# Altium PCB BMS.PcbDoc (part 1 of 2)
Units mil, origin at the board's own origin, x right, y up, seen from the top; angles counter-clockwise.
Board outline 4330.71 x 4330.71 mil, 2 copper layers (Top Layer, Bottom Layer); 161 components, 100 nets, 497 pads, 6 vias.
Unrouted connection lines stored in the file: 354.
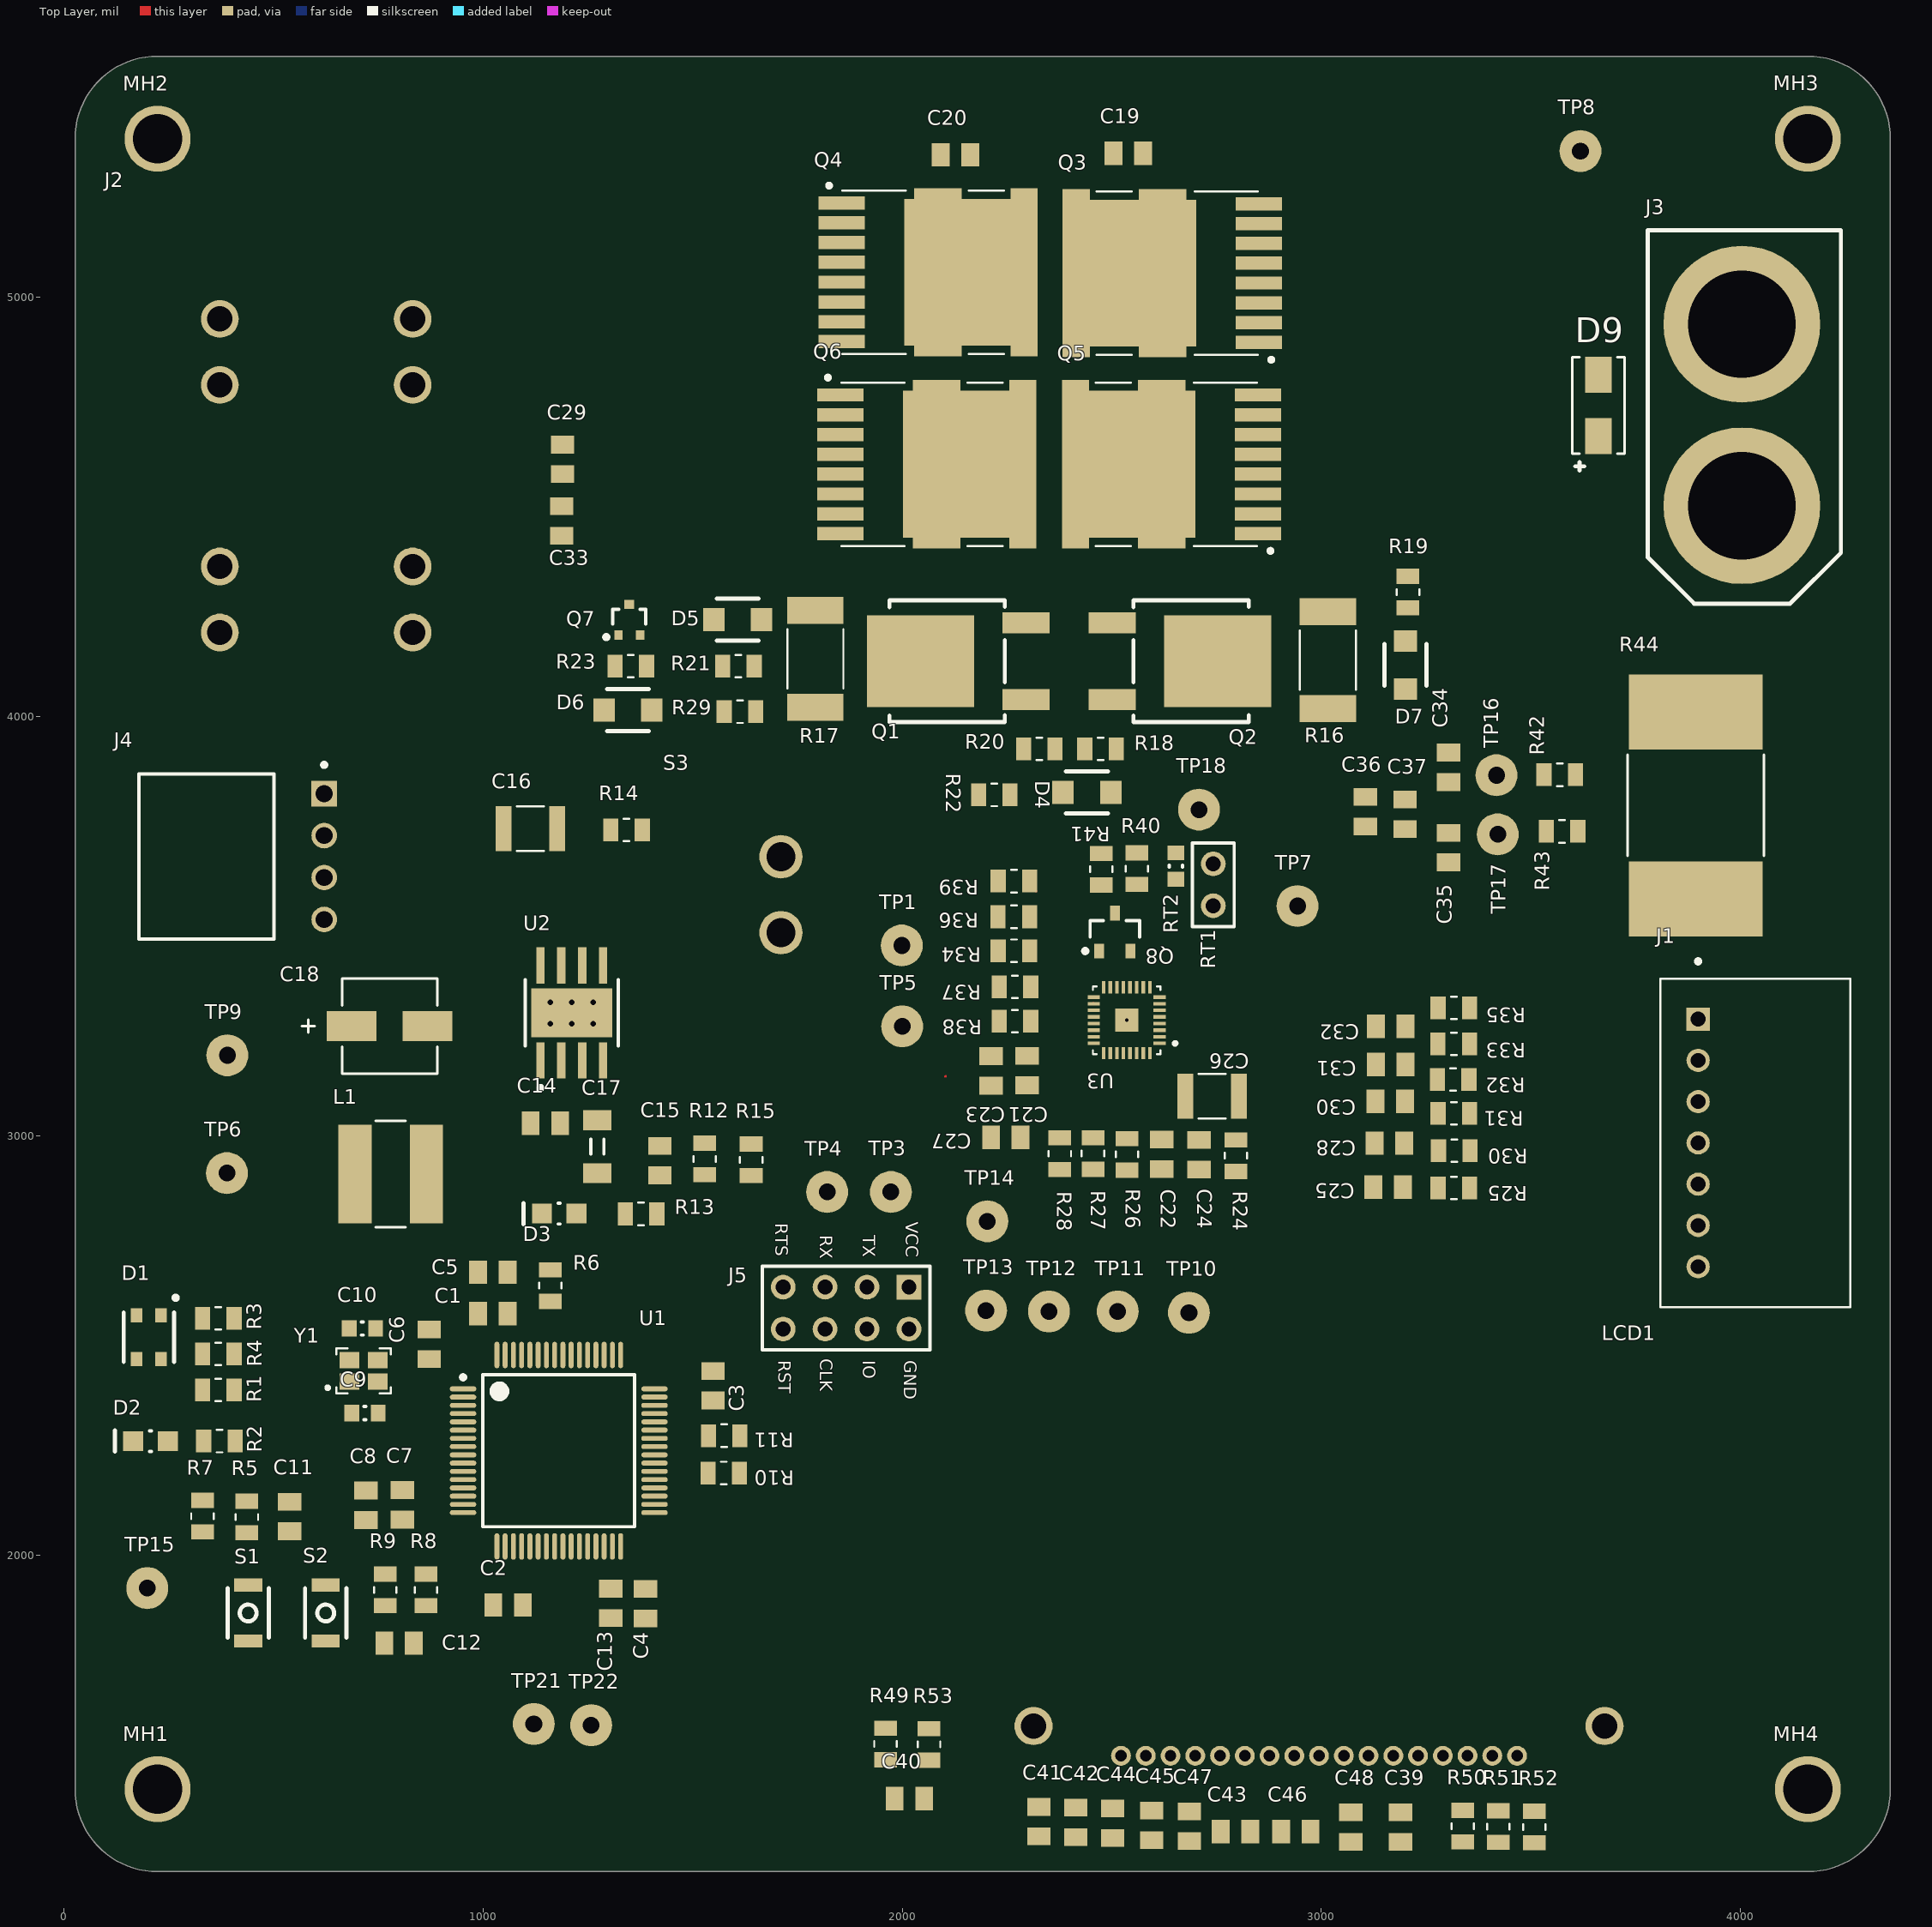
[diagram p0: Top Layer view]
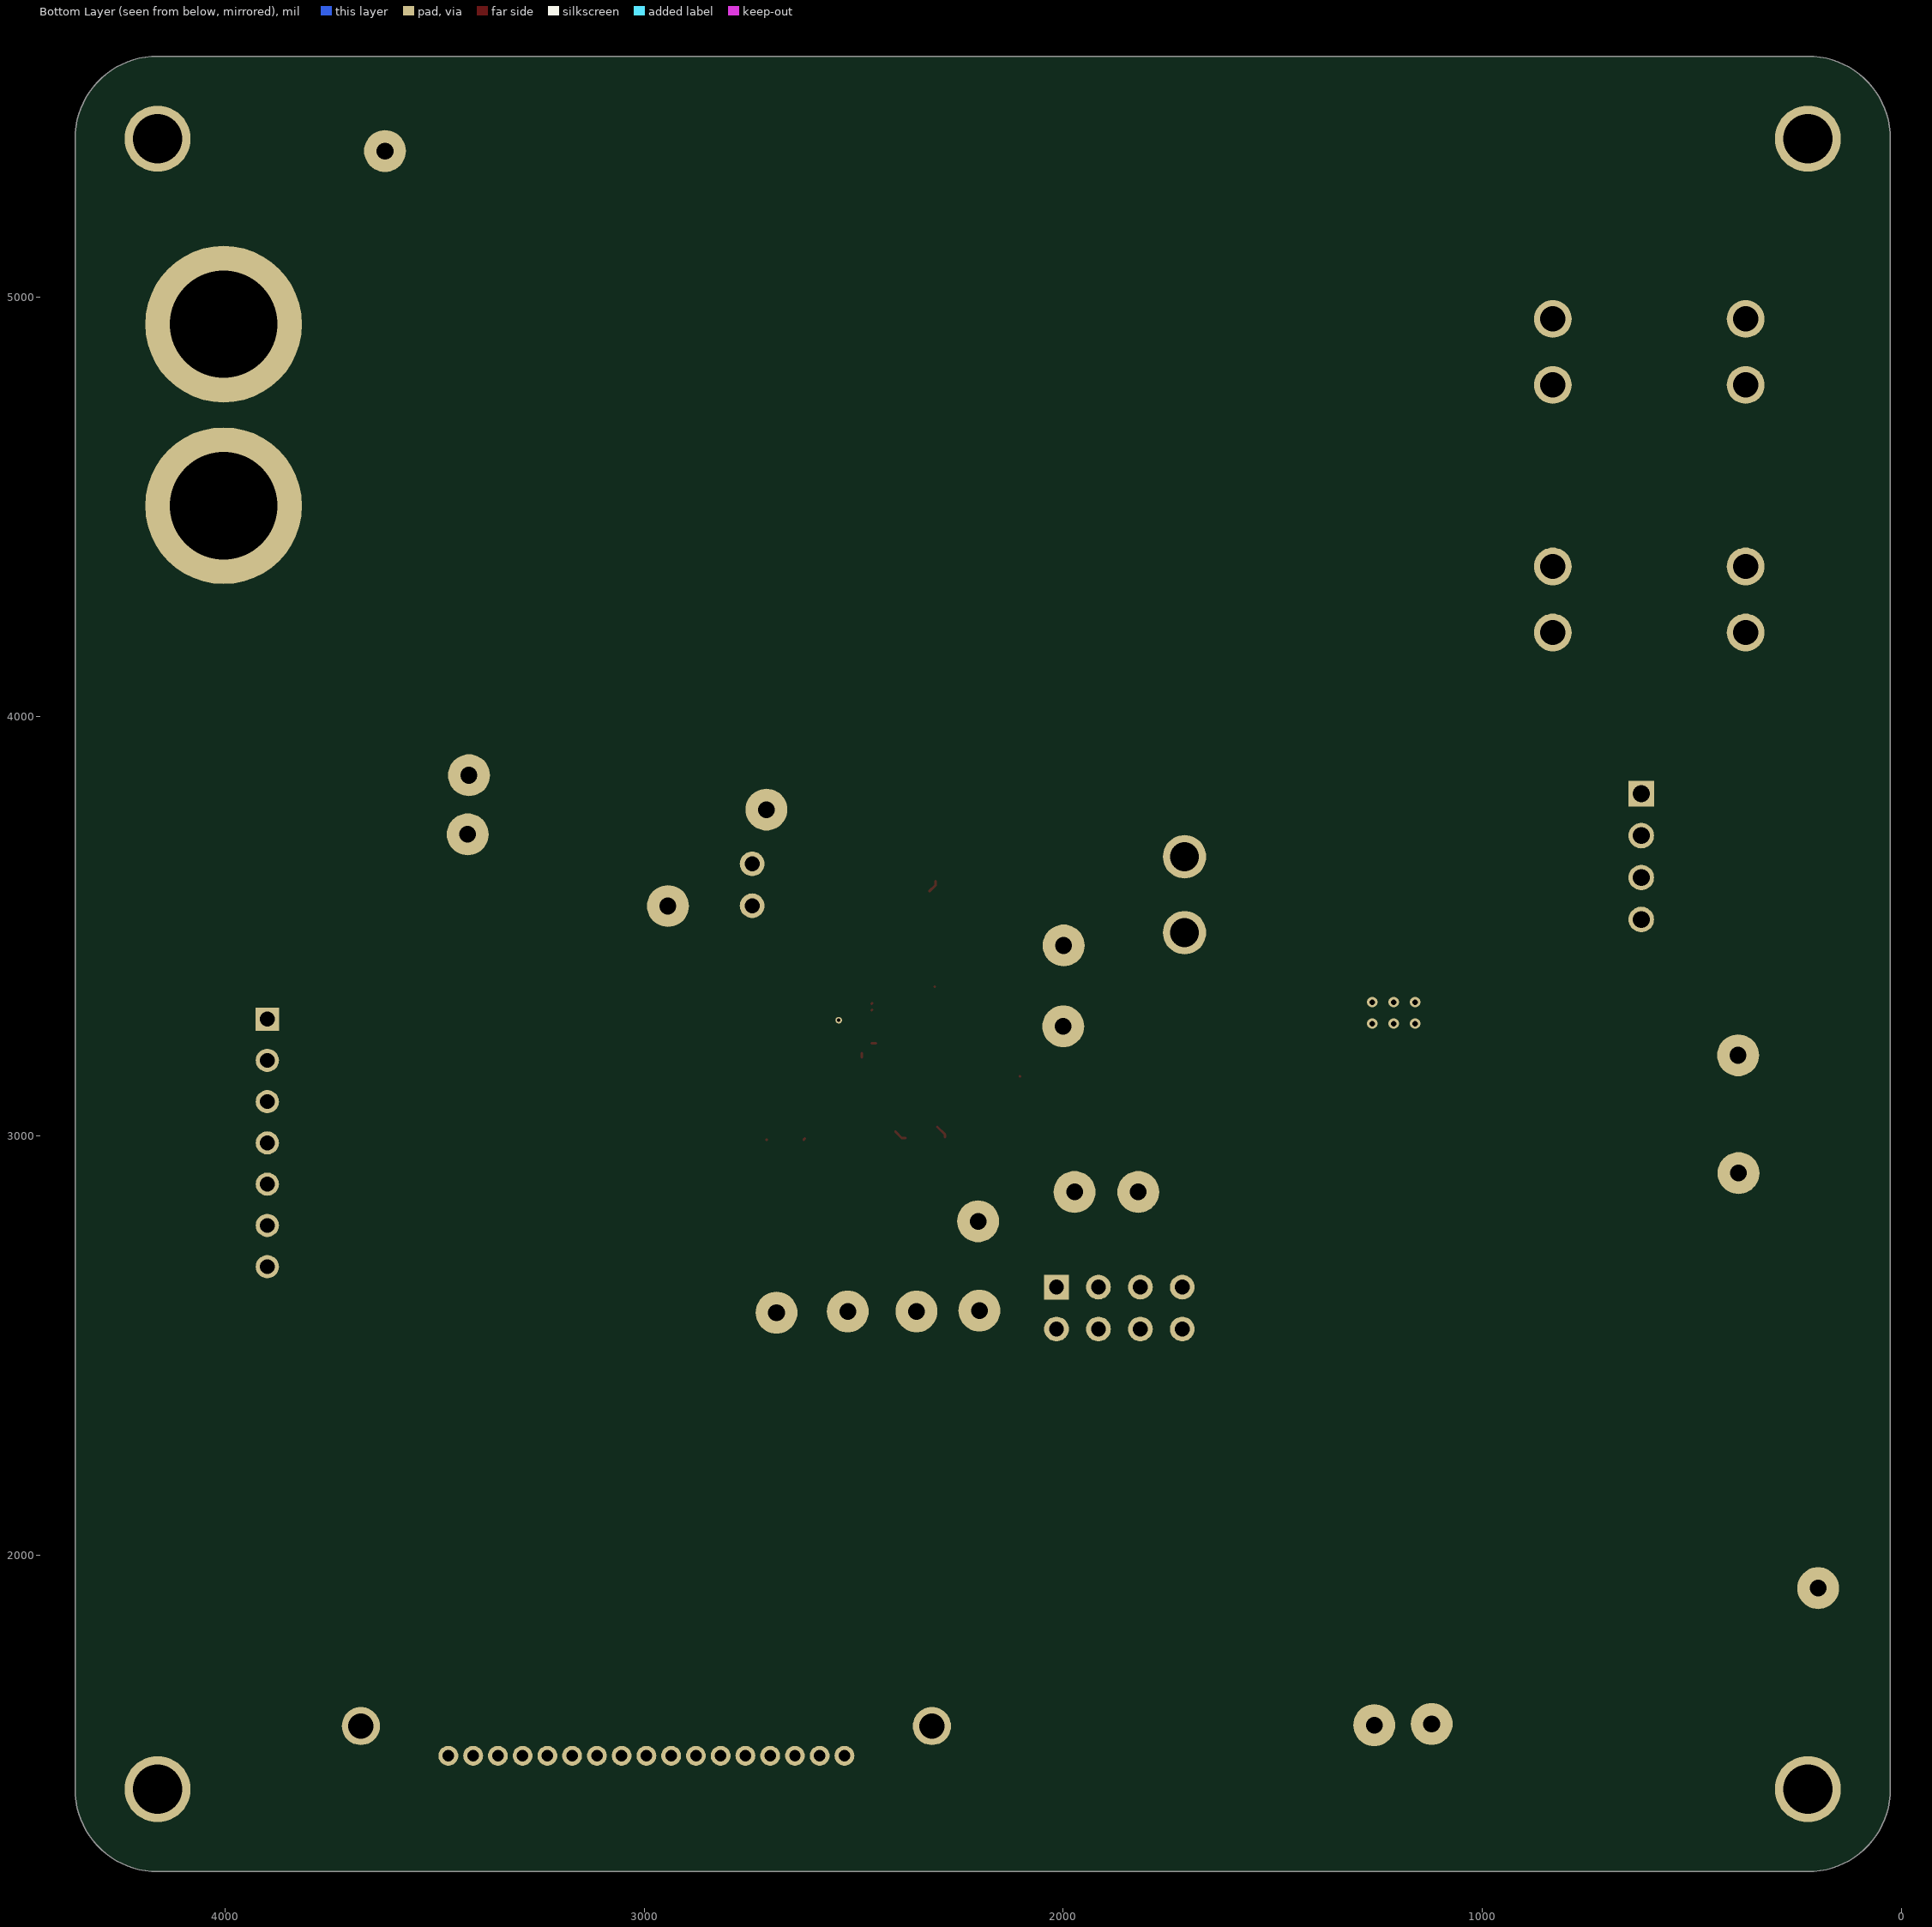
[diagram p1: Bottom Layer view, seen from below]

## Layer stack, top to bottom
Top Solder: solder mask 0.4, Solder Resist, Dk 3.5
Top Layer: signal copper 1.4
Dielectric 1: dielectric 12.6, FR-4, Dk 4.8
Bottom Layer: signal copper 1.4
Bottom Solder: solder mask 0.4, Solder Resist, Dk 3.5

## Board outline
223.54,1244.57 cw(c223.54,1441.42) 26.69,1441.42 26.69,5378.43 cw(c223.54,5378.43) 223.54,5575.28 4160.54,5575.28 cw(c4160.54,5378.43) 4357.4,5378.43 4357.4,1441.42 cw(c4160.54,1441.42) 4160.54,1244.57

## Design rules (kind name [scope] priority, off if disabled: settings)
Clearance [All] p1: gap=6 ignorepadtopadclearanceinfootprint=FALSE
Height [All] p1 off: minheight=0 maxheight=1000 prefheight=500
PolygonConnect [All] p1: connectstyle=Relief reliefconductorwidth=10 reliefentries=4 polygonreliefangle="90 Angle" airgapwidth=10
RoutingVias [All] p1: holewidth=28 width=50 viastyle="Through Hole" minholewidth=28 minwidth=50 maxholewidth=28 maxwidth=50
SolderMaskExpansion [All] p1: expansion=4 istentingtop=FALSE
Width [All] p1: maxlimit=6 minlimit=6 preferedwidth=6 minimp=50.000000 maximp=50.000000 favimp=50.000000
29 further rules are at their usual default settings.

## Classes and differential pairs
component class "SD Card": C38 D8 J6 R45 R46 R47 R48 TP19 TP20
component class Power: C14 C15 C16 C17 C18 D3 L1 R12 R13 R14 R15 S3 TP8 TP9 U2
component class MCU: C1 C2 C3 C4 C5 C6 C7 C8 C9 C10 C11 C12 C13 D1 D2 MH1 MH2 MH3 MH4 R1 R2 R3 R4 R5 R6 R7 R8 R9 R10 R11 S1 S2 TP1 TP2 TP3 TP4 TP5 TP6 TP7 U1 Y1
component class LCD: C39 C40 C41 C42 C43 C44 C45 C46 C47 C48 LCD1 R49 R50 R51 R52 R53 TP21 TP22
component class Connectors: D9 J1 J2 J3 J4 J5
component class "Battery Manager": C19 C20 C21 C22 C23 C24 C25 C26 C27 C28 C29 C30 C31 C32 C33 C34 C35 C36 C37 D4 D5 D6 D7 Q1 Q2 Q3 Q4 Q5 Q6 Q7 Q8 R16 R17 R18 R19 R20 R21 R22 R23 R24 R25 R26 R27 R28 R29 R30 R31 R32 R33 R34 R35 R36 R37 R38 R39 R40 R41 R42 R43 R44 RT1 RT2 TP10 TP11 TP12 TP13 TP14 TP15 TP16 TP17 TP18 U3

## Components (designator, comment, footprint, x,y, rotation, side; value= is the part's Value field where it differs from the comment)
C1 "CAP_0.1uF_50V_0805" CAPC2012X140N 1023.65,2575.65 r180 top value=0.1uF
C2 "CAP_0.1uF_50V_0805" CAPC2012X140N 1059.88,1880.65 r0 top value=0.1uF
C3 "CAP_0.1uF_50V_0805" CAPC2012X140N 1548.65,2403.65 r90 top value=0.1uF
C4 "CAP_0.1uF_50V_0805" CAPC2012X140N 1387.65,1883.65 r90 top value=0.1uF
C5 "CAP_4.7uF_16V_0805" CAPC2012X140N 1023.65,2674.65 r180 top value=4.7uF
C6 "CAP_0.1uF_50V_0805" CAPC2012X140N 871.65,2502.65 r270 top value=0.1uF
C7 "CAP_0.1uF_50V_0805" CAPC2012X140N 807.65,2119.65 r270 top value=0.1uF
C8 "CAP_1uF_16V_0805" CAPC2012X140N 720.65,2118.65 r270 top value=1uF
C9 "CL10C140JB8NNNC" CAPC0603(1608)55_N 718.14,2338.65 r180 top value=14pF
C10 "CL10C140JB8NNNC" CAPC0603(1608)55_N 712.11,2540.24 r180 top value=14pF
C11 "CAP_1uF_16V_0805" CAPC2012X140N 538.65,2091.65 r90 top value=1uF
C12 "CAP_1uF_16V_0805" CAPC2012X140N 799.65,1789.65 r0 top value=1uF
C13 "CAP_4.7uF_16V_0805" CAPC2012X140N 1304.65,1884.65 r90 top value=4.7uF
C14 "CAP_0.1uF_50V_0805" CAPC2012X140N 1148.65,3030.06 r0 top value=0.1uF
C15 "CAP_150pF_250V_0805" CAPC2012X140N 1421.65,2940.65 r90 top value=150pF
C16 "CAP_10uF_100V_1210" CAPC1210(3225) 1113.33,3732.65 r0 top value=10uF
C17 "CAP_2.2uF_50V_1206" CAPC1206(3216) 1272.65,2974.06 r90 top value=2.2uF
C18 "CAP_220uF_6.3V_SMD" PCAP_SVP_B6_PA00 777.15,3261.65 r0 top value=220uF
C19 "CAP_0.1uF_50V_0805" CAPC2012X140N 2539.22,5343.92 r180 top value=0.1uF
C20 "CAP_0.1uF_50V_0805" CAPC2012X140N 2126.98,5339.92 r180 top value=0.1uF
C21 "CAP_100pF_50V_0805" CAPC2012X140N 2297.71,3155.4 r90 top value=100pF
C22 "CAP_100pF_50V_0805" CAPC2012X140N 2619.04,2955.7 r270 top value=100pF
C23 "CAP_100pF_50V_0805" CAPC2012X140N 2211.71,3154.63 r90 top value=100pF
C24 "CAP_100pF_50V_0805" CAPC2012X140N 2708.04,2954.7 r270 top value=100pF
C25 "CAP_0.1uF_50V_0805" CAPC2012X140N 3159.1,2877.2 r180 top value=0.1uF
C26 "CAP_2.2uF_100V_1210" CAPC1210(3225) 2739.04,3094.44 r180 top value=2.2uF
C27 "CAP_0.01uF_100V_0805" CAPC2012X140N 2247.04,2996.44 r0 top value=0.01uF
C28 "CAP_0.1uF_50V_0805" CAPC2012X140N 3162.1,2982.2 r0 top value=0.1uF
C29 "CAP_0.1uF_50V_0805" CAPC2012X140N 1189.65,4613.65 r90 top value=0.1uF
C30 "CAP_0.1uF_50V_0805" CAPC2012X140N 3164.1,3082.2 r180 top value=0.1uF
C31 "CAP_0.1uF_50V_0805" CAPC2012X140N 3165.1,3170.2 r0 top value=0.1uF
C32 "CAP_0.1uF_50V_0805" CAPC2012X140N 3165.1,3261.2 r180 top value=0.1uF
C33 "CAP_0.1uF_50V_0805" CAPC2012X140N 1187.65,4466.65 r90 top value=0.1uF
C34 "CAP_0.1uF_50V_0805" CAPC2012X140N 3303.65,3879.07 r90 top value=0.1uF
C35 "CAP_0.1uF_50V_0805" CAPC2012X140N 3303.65,3687.31 r90 top value=0.1uF
C36 "CAP_100pF_50V_0805" CAPC2012X140N 3104.65,3773.07 r270 top value=100pF
C37 "CAP_0.1uF_50V_0805" CAPC2012X140N 3199.65,3767.07 r270 top value=0.1uF
C38 "CAP_0.1uF_50V_0805" CAPC2012X140N 9459,11028.76 r90 top value=0.1uF
C39 "CAP_0.1uF_50V_0805" CAPC2012X140N 3189,1351 r270 top value=0.1uF
C40 "CAP_0.1uF_50V_0805" CAPC2012X140N 2017,1419 r0 top value=0.1uF
C41 "CAP_0.1uF_50V_0805" CAPC2012X140N 2326,1364 r90 top value=0.1uF
C42 "CAP_0.1uF_50V_0805" CAPC2012X140N 2414,1362 r90 top value=0.1uF
C43 "CAP_2.2uF_25V_0805" CAPC2012X140N 2795,1340 r180 top value=2.2uF
C44 "CAP_0.1uF_50V_0805" CAPC2012X140N 2502,1360 r90 top value=0.1uF
C45 "CAP_0.1uF_50V_0805" CAPC2012X140N 2595,1355 r90 top value=0.1uF
C46 "CAP_2.2uF_25V_0805" CAPC2012X140N 2939,1340 r180 top value=2.2uF
C47 "CAP_0.1uF_50V_0805" CAPC2012X140N 2685,1353 r90 top value=0.1uF
C48 "CAP_2.2uF_25V_0805" CAPC2012X140N 3070,1351 r90 top value=2.2uF
D1 "LED_RGB" LED_RGB 202.68,2519.48 r180 top
D2 "DIO_LED_G" LED_0805_LINE 206.65,2271.65 r180 top
D3 "DIO_LED_G" LED_0805_LINE 1181.61,2814.22 r180 top
D4 "B0540W-7-F" SOD-123_FLAT 2440.65,3819.07 r0 top value=170pF
D5 "DIO_ZENER_16V" SOD-123_FLAT 1607.65,4231.5 r180 top
D6 "1N4148W-7-F" SOD-123_FLAT 1345.65,4015.5 r180 top value=100V
D7 "B0540W-7-F" SOD-123_FLAT 3200.65,4123.16 r90 top value=170pF
D8 "DIO_LED_G" LED_0805_LINE 8612,10587 r270 top
D9 "P4SMA30A-E3/61" DO-214AC_UNI 3661,4741.88 r90 top
J1 "CON_7M_TH_RA" JST_S7B-XH-A(LF)(SN) 4035,2983 r270 top
J2 "SCREW_TERM_115A" MOLEX-0399200302 635.15,4751.7 r270 top
J3 "XT90" XT90 1680.17,1983.24 r0 top
J4 "CON_4M_TH_RA" MOLEX-22-05-3041_V 621,3666 r270 top
J5 "HEADER 4X2" HEADER_2X4 2016,2639 r180 top
J6 "SD_CARD_CON" HRS_DM1AA-SF-PEJ(21) 9378,10233 r0 top
L1 "SRN6045-150M" IND_BOURNS_SRN6045 779.65,2908.65 r0 top
LCD1 "NHD-C12832A1Z-FSW-FBW-3V3" NHDC12832A1ZFSWFBW3V3 2521.94,1521 r0 top
MH1 "MOUNTING_HOLES" MOUNTING_HOLE 223.54,1441.42 r0 top
MH2 "MOUNTING_HOLES" MOUNTING_HOLE 223.54,5378.43 r0 top
MH3 "MOUNTING_HOLES" MOUNTING_HOLE 4160.54,5378.43 r0 top
MH4 "MOUNTING_HOLES" MOUNTING_HOLE 4160.54,1441.42 r0 top
Q1 "PMOS_40V_40A" D-PAK 2169.65,4132.07 r90 top
Q2 "PMOS_40V_40A" D-PAK 2626.66,4132.07 r270 top
Q3 "NMOS_100V_210A" 8-HPSOF 2644.22,5057.92 r90 top
Q4 "NMOS_100V_210A" 8-HPSOF 2061.83,5059.92 r270 top
Q5 "NMOS_100V_210A" 8-HPSOF 2642.22,4601.92 r90 top
Q6 "NMOS_100V_210A" 8-HPSOF 2058.83,4601.92 r270 top
Q7 "NMOS_60V_310mA" SOT323 1349.06,4230.91 r270 top
Q8 "NMOS_50V_200mA" SOT23-3 2507.44,3485.98 r90 top
R1 "RES_20Ω_0805" RESC2012X60N 368.65,2393.65 r0 top value=20Ω
R2 "RES_100Ω_0805" RESC2012X60N 371.05,2271.65 r0 top value=100Ω
R3 "RES_100Ω_0805" RESC2012X60N 368.65,2564.65 r180 top value=100Ω
R4 "RES_20Ω_0805" RESC2012X60N 368.65,2479.65 r0 top value=20Ω
R5 "RES_1kΩ_0805" RESC2012X60N 436.65,2090.65 r270 top value=1kΩ
R6 "RES_10kΩ_0805" RESC2012X60N 1160.65,2642.65 r90 top value=10kΩ
R7 "RES_10kΩ_0805" RESC2012X60N 330.65,2092.65 r90 top value=10kΩ
R8 "RES_1kΩ_0805" RESC2012X60N 863.65,1916.65 r90 top value=1kΩ
R9 "RES_10kΩ_0805" RESC2012X60N 766.65,1916.65 r90 top value=10kΩ
R10 "RES_1kΩ_0805" RESC2012X60N 1574.24,2195.65 r0 top value=1kΩ
R11 "RES_1kΩ_0805" RESC2012X60N 1575.24,2284.65 r0 top value=1kΩ
R12 "RES_51kΩ_0805" RESC2012X60N 1528.65,2944.65 r270 top value=51kΩ
R13 "RES_100Ω_0805" RESC2012X60N 1377.24,2813.65 r0 top value=100Ω
R14 "RES_1kΩ_0805" RESC2012X60N 1342.24,3729.65 r180 top value=1kΩ
R15 "RES_22.1kΩ_0805" RESC2012X60N 1639.65,2942.65 r90 top
R16 "RES_200Ω_2512" RESC6532X75N 3015.65,4134.65 r270 top value=200Ω
R17 "RES_200Ω_2512" RESC6532X75N 1792.65,4137.5 r90 top value=200Ω
R18 "RES_10MΩ_0805" RESC2012X60N 2473.24,3923.07 r180 top value=10MΩ
R19 "RES_10MΩ_0805" RESC2012X60N 3206.65,4297.07 r270 top value=10MΩ
R20 "RES_10MΩ_0805" RESC2012X60N 2327.05,3923.07 r0 top value=10MΩ
R21 "RES_10MΩ_0805" RESC2012X60N 1609.24,4120.5 r0 top value=10MΩ
R22 "RES_510Ω_0805" RESC2012X60N 2219.65,3813.07 r0 top value=510Ω
R23 "RES_10kΩ_0805" RESC2012X60N 1352.65,4120.5 r180 top value=10kΩ
R24 "RES_100Ω_0805" RESC2012X60N 2796.04,2952.44 r90 top value=100Ω
R25 "RES_100Ω_0805" RESC2012X60N 3316.1,2875.2 r180 top value=100Ω
R26 "RES_1kΩ_0805" RESC2012X60N 2536.04,2955.7 r270 top value=1kΩ
R27 "RES_10kΩ_0805" RESC2012X60N 2455.04,2957.7 r270 top value=10kΩ
R28 "RES_1kΩ_0805" RESC2012X60N 2376.04,2957.3 r270 top value=1kΩ
R29 "RES_1.1kΩ_0805" RESC2012X60N 1613.05,4011.5 r0 top value=1.1kΩ
R30 "RES_100Ω_0805" RESC2012X60N 3317.1,2964.2 r180 top value=100Ω
R31 "RES_100Ω_0805" RESC2012X60N 3316.1,3053.2 r180 top value=100Ω
R32 "RES_100Ω_0805" RESC2012X60N 3314.5,3134.2 r180 top value=100Ω
R33 "RES_100Ω_0805" RESC2012X60N 3315.7,3219.2 r180 top value=100Ω
R34 "RES_10kΩ_0805" RESC2012X60N 2266.63,3441.44 r180 top value=10kΩ
R35 "RES_100Ω_0805" RESC2012X60N 3316.1,3305.2 r180 top value=100Ω
R36 "RES_100Ω_0805" RESC2012X60N 2266.23,3522.44 r0 top value=100Ω
R37 "RES_10kΩ_0805" RESC2012X60N 2269.04,3355.44 r180 top value=10kΩ
R38 "RES_10kΩ_0805" RESC2012X60N 2269.04,3273.44 r180 top value=10kΩ
R39 "RES_100Ω_0805" RESC2012X60N 2266.63,3607.44 r0 top value=100Ω
R40 "RES_10MΩ_0805" RESC2012X60N 2560.04,3637.04 r90 top value=10MΩ
R41 "RES_10MΩ_0805" RESC2012X60N 2475.04,3635.7 r270 top value=10MΩ
R42 "RES_100Ω_0805" RESC2012X60N 3568.65,3861.07 r180 top value=100Ω
R43 "RES_100Ω_0805" RESC2012X60N 3574.24,3726.07 r180 top value=100Ω
R44 "RES_1mΩ_5931" RES-5931 3893,3788 r270 top value=1mΩ
R45 "RES_1kΩ_0805" RESC2012X60N 8651,10019 r180 top value=1kΩ
R46 "RES_1kΩ_0805" RESC2012X60N 8642,10368 r180 top value=1kΩ
R47 "RES_100Ω_0805" RESC2012X60N 8612,10801 r90 top value=100Ω
R48 "RES_1kΩ_0805" RESC2012X60N 9649,11038 r90 top value=1kΩ
R49 "RES_100Ω_0805" RESC2012X60N 1960,1549 r270 top value=100Ω
R50 "RES_1kΩ_0805" RESC2012X60N 3337,1353 r270 top value=1kΩ
R51 "RES_1kΩ_0805" RESC2012X60N 3422,1352 r270 top value=1kΩ
R52 "RES_1kΩ_0805" RESC2012X60N 3508,1351 r270 top value=1kΩ
R53 "RES_1kΩ_0805" RESC2012X60N 2064,1548 r90 top value=1kΩ
RT1 "THERM_10k_FREE_HANGING" "HDR1X2 - PTH Thermistor" 2742.04,3548.7 r90 top
RT2 "THERM_10k_0603" RESC0603(1608)_N 2653.04,3611.71 r90 top
S1 "SW_TACTILE" B3U-1000P 439.65,1861.65 r270 top
S2 "SW_TACTILE" B3U-1000P 624.65,1861.65 r270 top
S3 "GF-123-0054" GF1230054 1710.65,3484.55 r270 top
TP1 "TESTPOINT_LOOP" TESTPOINT_LOOP 1999,3454 r0 top
TP2 "TESTPOINT_LOOP" TESTPOINT_LOOP 9438,8356 r0 top
TP3 "TESTPOINT_LOOP" TESTPOINT_LOOP 1973,2866 r0 top
TP4 "TESTPOINT_LOOP" TESTPOINT_LOOP 1821,2866 r0 top
TP5 "TESTPOINT_LOOP" TESTPOINT_LOOP 2000,3261 r0 top
TP6 "TESTPOINT_LOOP" TESTPOINT_LOOP 389,2911 r0 top
TP7 "TESTPOINT_LOOP" TESTPOINT_LOOP 2943,3548 r0 top
TP8 "TESTPOINT_LOOP" TESTPOINT_LOOP 3618,5349 r0 top
TP9 "TESTPOINT_LOOP" TESTPOINT_LOOP 390,3192 r0 top
TP10 "TESTPOINT_LOOP" TESTPOINT_LOOP 2684,2578 r90 top
TP11 "TESTPOINT_LOOP" TESTPOINT_LOOP 2514,2581 r90 top
TP12 "TESTPOINT_LOOP" TESTPOINT_LOOP 2350,2581 r90 top
TP13 "TESTPOINT_LOOP" TESTPOINT_LOOP 2200,2583 r90 top
TP14 "TESTPOINT_LOOP" TESTPOINT_LOOP 2203,2796 r90 top
TP15 "TESTPOINT_LOOP" TESTPOINT_LOOP 199,1921 r90 top
TP16 "TESTPOINT_LOOP" TESTPOINT_LOOP 3417.65,3860.07 r180 top
TP17 "TESTPOINT_LOOP" TESTPOINT_LOOP 3420.65,3719.07 r180 top
TP18 "TESTPOINT_LOOP" TESTPOINT_LOOP 2708,3778 r90 top
TP19 "TESTPOINT_LOOP" TESTPOINT_LOOP 9556,11261 r90 top
TP20 "TESTPOINT_LOOP" TESTPOINT_LOOP 9068,11246 r90 top
TP21 "TESTPOINT_LOOP" TESTPOINT_LOOP 1121,1597 r90 top
TP22 "TESTPOINT_LOOP" TESTPOINT_LOOP 1258,1594 r90 top
U1 "STM32F446RET6" STM-LQFP64_L 1180.65,2248.65 r0 top
U2 "LMR23610ADDAR" "8-SO PowerPad" 1211.65,3293.06 r90 top
U3 "BQ40Z80RSMT" BQ40Z80RSMT 2535.58,3275.58 r180 top
Y1 "CRYSTAL_25MHZ" SOIC254P1016X440-4N 715.11,2439.24 r0 top

## Footprints (in the part's own frame and the unit in brackets; to place one, negate y for a bottom-side part, rotate by r counter-clockwise, add the part's x,y. Pads: shape width x height; smd on the part's side, far side on the other; paste and mask are expansions set on the pad)
8-HPSOF [mm]
  rect 0.8x2.8 smd: 1(-4.2,-5.24) 2(-3,-5.24) 2(-1.8,-5.24) 2(-0.6,-5.24) 2(0.6,-5.24) 2(1.8,-5.24) 2(3,-5.24) 2(4.2,-5.24)
  rect 10.2x1.65 smd: 3(0,5.815)
  rect 8.9x2.95 smd: 3(0,3.515)
  rect 8.9x0.6 smd: 3(0,-1.16)
  rect 10.2x2.9 smd: 3(0,0.59)
  silkscreen extent -5.37,-6.12 4.95,4.6, body extent -4.95,-5.83 4.95,5.84, height 1.8
"8-SO PowerPad" [mm]
  rect 2.2x0.5 smd paste-1000 mask+0: 1(-2.875,1.905) 2(-2.875,0.635) 3(-2.875,-0.635) 4(-2.875,-1.905) 5(2.875,-1.905) 6(2.875,-0.635) 7(2.875,0.635) 8(2.875,1.905)
  rect 2.95x4.9 smd paste-1000 mask-1000: 9(0,0)
  silkscreen extent -4.67,-2.83 2,2.83, body extent -4.08,-2.68 4.08,2.68, height 0.25
B3U-1000P [mm] "TACTILE SWITCH GREY"
  rect 0.8x1.7 smd: 1(-1.7,0) 2(1.7,0)
  silkscreen extent -1.5,-1.25 1.5,1.25, body extent -2,-1.25 2,1.25, height 1.6
BQ40Z80RSMT [mm] "QFN40P400X400X100-33N_BQ40Z80RSMT(Primary)"
  rect 0.74x0.22 smd: 1(-1.995,1.4) 2(-1.995,1) 3(-1.995,0.6) 4(-1.995,0.2) 5(-1.995,-0.2) 6(-1.995,-0.6) 7(-1.995,-1) 8(-1.995,-1.4) 17(1.995,-1.4) 18(1.995,-1) 19(1.995,-0.6) 20(1.995,-0.2) 21(1.995,0.2) 22(1.995,0.6) 23(1.995,1) 24(1.995,1.4)
  rect 0.22x0.74 smd: 9(-1.4,-1.995) 10(-1,-1.995) 11(-0.6,-1.995) 12(-0.2,-1.995) 13(0.2,-1.995) 14(0.6,-1.995) 15(1,-1.995) 16(1.4,-1.995) 25(1.4,1.995) 26(1,1.995) 27(0.6,1.995) 28(0.2,1.995) 29(-0.2,1.995) 30(-0.6,1.995) 31(-1,1.995) 32(-1.4,1.995)
  rect 1.4x1.4 smd: 33(0,0)
  round 0.4 hole 0.2: 33_1(0,0)
  silkscreen extent -3.03,-2.05 2.05,2.05, body extent -2,-2 2,2, height 1
CAPC0603(1608)55_N [mm] "Chip Capacitor, Body 1.6x0.8mm, Height 0.55mm, IPC Medium Density"
  rect 0.9x1 smd: 1(-0.8,0) 2(0.8,0)
  silkscreen extent -0.05,-0.4 0.05,0.4, body extent -0.88,-0.48 0.88,0.47, height 0.55
CAPC1206(3216) [mm] "Chip Capacitor, Body 3.2x1.6mm, Height 0.55mm, IPC Medium Density"
  rect 1.2x1.7 smd: 1(-1.6,0) 2(1.6,0)
  silkscreen extent -0.45,-0.4 0.45,0.4, body extent -1.6,-0.85 1.6,0.85, height 1.75
CAPC1210(3225) [mm]
  rect 0.96x2.72 smd: 1(-1.625,0) 2(1.625,0)
  silkscreen extent -0.82,-1.35 0.82,1.35, body extent -1.6,-1.25 1.6,1.25, height 2.2
CAPC2012X140N [mm]
  rect 1.08x1.42 smd: 1(-0.895,0) 2(0.895,0)
  body extent -1,-0.62 1,0.62, height 1.4
D-PAK [mm] "TO-252AA"
  rect 5.55x6.5 smd: 1(0,3.2)
  rect 1.25x2.85 smd: 2(-2.325,-3.2) 3(2.325,-3.2)
  silkscreen extent -3.68,-1.91 3.68,5.08, body extent -3.27,-4.08 3.27,5.8, height 2.64
DO-214AC_UNI [mm]
  rect 2.18x1.63 smd: 1(-1.857,0) 2(1.857,0)
  silkscreen extent -3.94,-1.59 2.92,1.59, body extent -2.6,-1.3 2.6,1.3, height 2.38
GF1230054 [mil]
  round 103.35 / inner round 60 / far side round 103.35 hole 68.9: 1(-181.1,0) 2(0,0)
  body extent -323,-245 325,155, height 654
"HDR1X2 - PTH Thermistor" [mm] "Connector; Header; 2 Position"
  round 1.5 hole 0.9: 1(0,0) 2(2.54,0)
  silkscreen extent -1.27,-1.27 3.81,1.27
HEADER_2X4 [mm]
  rect 1.5x1.5 hole 0.9: 1(0,0)
  round 1.5 hole 0.9: 2(2.54,0) 3(5.08,0) 4(7.62,0) 5(0,2.54) 6(2.54,2.54) 7(5.08,2.54) 8(7.62,2.54)
  silkscreen extent -1.27,-1.27 8.89,3.81, body extent -1.36,-1.32 8.8,3.67, height 8.54
HRS_DM1AA-SF-PEJ(21) [mm]
  rect 1.1x2 smd: 1(6.875,14.95) 2(4.375,14.95) 3(1.875,14.95) 4(-0.625,14.95) 5(-3.125,14.95) 6(-5.625,14.95) 7(-8.05,14.95) 8(-9.75,14.95) 9(9.375,14.95)
  rect 2x1 smd: 10(-13.3,3.55) 11(-13.3,-5.4) 12(-13.3,-8)
  rect 2x2 smd: 13(-13.7,8.2) 14(-13.7,-10.45) 15(15.3,-10.45) 16(15.3,8.2)
  round 1.3 hole 1.3 unplated: ""(-11.1,12.75) ""(11.3,12.75)
  silkscreen extent -13.2,-15.25 14.8,16.85, body extent -14.2,-15.25 15.8,15.25, height 2.9
IND_BOURNS_SRN6045 [mil]
  rect 79x236 smd paste+0 mask+0: 1(-85,0) 2(85,0)
  silkscreen extent -36,-127 36,127, body extent -118,-118 118,118, height 177
JST_S7B-XH-A(LF)(SN) [mm]
  rect 1.408x1.408 hole 0.9: 1(-7.5,-3.46)
  round 1.408 hole 0.9: 2(-5,-3.46) 3(-2.5,-3.46) 4(0,-3.46) 5(2.5,-3.46) 6(5,-3.46) 7(7.5,-3.46)
  silkscreen extent -11.12,-5.75 9.95,5.75, body extent -9.95,-5.75 9.95,5.75, height 6.15
LED_0805_LINE [mm] "SMD, 2-Leads, Body 2x1.25mm"
  rect 1.2x1.2 smd: 1(-1.05,0) 2(1.05,0)
  silkscreen extent -0.05,-0.63 2.16,0.64, body extent -1,-0.63 1,0.63, height 0.8
LED_RGB [mm]
  rect 0.7x0.86 smd: 1(-0.737,-1.325) 2(-0.737,1.325) 3(0.737,1.325) 4(0.738,-1.325)
  silkscreen extent -1.75,-2.51 1.53,1.5, body extent -1.4,-1.75 1.4,1.75, height 1.89
MOLEX-22-05-3041_V [mm] "CONN, 4-Leads, Body 10.01x8.18mm, Pitch 2.54mm"
  rect 1.55x1.55 hole 1.02: 1(-3.81,0)
  round 1.55 hole 1.02: 2(-1.27,0) 3(1.27,0) 4(3.81,0)
  silkscreen extent -5.68,-11.23 5,0.13, body extent -5,-12.61 5,0.32, height 6.43
MOLEX-0399200302 [mil] "CONN, 4-Leads, Body 10.01x8.18mm, Pitch 2.54mm"
  round 90 hole 60: 1(-196.85,196.85) 1(-196.85,-263.15) 1(-39.37,196.85) 1(-39.37,-263.15) 2(393.7,196.85) 2(393.7,-263.15) 2(551.18,196.85) 2(551.18,-263.15)
  body extent -448,-512 802,300, height 1480
MOUNTING_HOLE [mm]
  round 4 hole 3 unplated: 0(0,0)
NHDC12832A1ZFSWFBW3V3 [mm]
  round 1.2 / inner round 1.524 / far side round 1.2 hole 0.7: 1(0,0) 2(1.5,0) 3(3,0) 4(4.5,0) 5(6,0) 6(7.5,0) 7(9,0) 8(10.5,0) 9(12,0) 10(13.5,0) 11(15,0) 12(16.5,0) 13(18,0) 14(19.5,0) 15(21,0) 16(22.5,0) 17(24,0)
  round 2.31 / inner round 1.524 / far side round 2.31 hole 1.54: A(-5.3,1.8) K(29.3,1.8)
  body extent -8.66,-0.72 32.74,23.58, height 4
PCAP_SVP_B6_PA00 [mil]
  rect 119x72 smd paste+0 mask+0: 1(-90.5,0) 2(90.5,0)
  silkscreen extent -209,-113 114,114, body extent -124,-110 120,107, height 238
RES-5931 [mil]
  rect 179x319 smd paste+0 mask+0: 1(-223,0) 2(223,0)
  silkscreen extent -121,-163 121,163, body extent -290,-150 300,155, height 53
RESC0603(1608)_N [mm] "Chip Resistor, Body 1.6x0.8mm, IPC Medium Density"
  rect 0.9x1 smd: 1(0,0) 2(1.6,0)
  silkscreen extent 0.75,-0.4 0.85,0.4, body extent -0.05,-0.47 1.65,0.47, height 0.6
RESC2012X60N [mm]
  rect 0.92x1.38 smd: 1(-0.955,0) 2(0.955,0)
  silkscreen extent -0.17,-0.68 0.17,0.68, body extent -1,-0.62 1,0.62, height 0.6
RESC6532X75N [mm]
  rect 1.64x3.42 smd: 1(-2.935,0) 2(2.935,0)
  silkscreen extent -1.79,-1.7 1.79,1.7, body extent -3.17,-1.6 3.17,1.6, height 0.65
SOD-123_FLAT [mm]
  rect 1.3x1.4 smd: 1(-1.45,0) 2(1.45,0)
  silkscreen extent -1.27,-1.27 1.27,1.27, body extent -1.92,-1.08 1.93,1.08, height 1.35
SOIC254P1016X440-4N [mm]
  rect 1.2x1 smd: 1(-0.85,-0.65) 2(0.85,-0.65) 3(0.85,0.65) 4(-0.85,0.65)
  silkscreen extent -2.27,-1.37 1.65,1.37, body extent -1.24,-0.85 1.24,0.85, height 0.56
SOT23-3 [mm] "SOT23, 3-Leads, Body 2.90x2.30mm, Pitch 0.95mm, IPC Medium Density"
  rect 0.9x0.6 smd: 1(-1.15,0.95) 2(-1.15,-0.95) 3(1.15,0)
  silkscreen extent -1.27,-1.5 0.7,1.92, body extent -1.3,-1.5 1.3,1.5, height 1.1
SOT323 [mm]
  rect 0.55x0.5 smd: 1(0.925,-0.65) 2(0.925,0.65)
  rect 0.55x0.6 smd: 3(-0.925,0)
  silkscreen extent -0.64,-1.52 1.17,1, body extent -1.05,-1 1.05,1, height 1.11
STM-LQFP64_L [mm] "QFP, 64-Leads, Body 10x10mm, Pitch 0.5mm, IPC High Density"
  oval 1.6x0.3 smd: 1(-5.8,3.75) 2(-5.8,3.25) 3(-5.8,2.75) 4(-5.8,2.25) 5(-5.8,1.75) 6(-5.8,1.25) 7(-5.8,0.75) 8(-5.8,0.25) 9(-5.8,-0.25) 10(-5.8,-0.75) 11(-5.8,-1.25) 12(-5.8,-1.75) 13(-5.8,-2.25) 14(-5.8,-2.75) 15(-5.8,-3.25) 16(-5.8,-3.75) 33(5.8,-3.75) 34(5.8,-3.25) 35(5.8,-2.75) 36(5.8,-2.25) 37(5.8,-1.75) 38(5.8,-1.25) 39(5.8,-0.75) 40(5.8,-0.25) 41(5.8,0.25) 42(5.8,0.75) 43(5.8,1.25) 44(5.8,1.75) 45(5.8,2.25) 46(5.8,2.75) 47(5.8,3.25) 48(5.8,3.75)
  oval 0.3x1.6 smd: 17(-3.75,-5.8) 18(-3.25,-5.8) 19(-2.75,-5.8) 20(-2.25,-5.8) 21(-1.75,-5.8) 22(-1.25,-5.8) 23(-0.75,-5.8) 24(-0.25,-5.8) 25(0.25,-5.8) 26(0.75,-5.8) 27(1.25,-5.8) 28(1.75,-5.8) 29(2.25,-5.8) 30(2.75,-5.8) 31(3.25,-5.8) 32(3.75,-5.8) 49(3.75,5.8) 50(3.25,5.8) 51(2.75,5.8) 52(2.25,5.8) 53(1.75,5.8) 54(1.25,5.8) 55(0.75,5.8) 56(0.25,5.8) 57(-0.25,5.8) 58(-0.75,5.8) 59(-1.25,5.8) 60(-1.75,5.8) 61(-2.25,5.8) 62(-2.75,5.8) 63(-3.25,5.8) 64(-3.75,5.8)
  silkscreen extent -5.92,-4.6 4.6,4.6, body extent -5,-5 5,5, height 1.6
TESTPOINT_LOOP [mm]
  round 2.54 hole 1.02: 1(0,0)
  body extent -1.27,-1.27 1.27,1.27, height 4.57
XT90 [mm]
  round 9.5 hole 6.5: 1(59,75) 2(59,64)
  silkscreen extent 53.3,58.06 65,80.7, body extent 53.82,58.82 64.52,80.22, height 21.04

## Part data
C1 C2 C3 C4 C6 C7 C14 C19 C20 C25 C28 C29 C30 C31 C32 C33 C34 C35 C37 C38 C39 C40 C41 C42 C44 C45 C47: "CAP CER 0.1UF 50V X7R 0805", Capacitance=100nF, Case Code (Imperial)=0805, Case Code (Metric)=2012, Dielectric=X7R, Manufacturer 1="Murata Electronics", Manufacturer Part Number 1=GCD21BR71H104KA01L, Max Operating Temperature=125°C, Min Operating Temperature=-55°C, Ratings=AEC-Q200, Supplier Part Number 1=490-11955-1-ND, Tolerance=10%, Voltage Rating=50V, Case/Package=0805, ComponentLink1Description=https://datasheet.ciiva.com/29537/c03e-29537701.pdf?src-supplier=Digi-Key, ComponentLink1URL=https://datasheet.ciiva.com/29537/c03e-29537701.pdf?src-supplier=Digi-Key, Depth=1.25mm, Height=1.25mm, Length=2mm, Mount="Surface Mount", Supplier 1=Digi-Key, Termination=SMD/SMT, Thickness=0.049inch, Width=0.049inch
C5 C13: "CAP CER 4.7UF 16V X5R 0805", Capacitance=4.7uF, Case Code (Imperial)=0805, Case Code (Metric)=2012, Dielectric=X5R, Manufacturer 1="Samsung Electro-Mechanics", Manufacturer Part Number 1=CL21A475KOFNNNE, Max Operating Temperature=85°C, Min Operating Temperature=-55°C, Supplier Part Number 1=1276-1065-1-ND, Tolerance=10%, Voltage Rating=16V, Case/Package=0805, Mount="Surface Mount", Supplier 1=Digi-Key, Termination=SMD/SMT
C8 C11 C12: "CAP CER 1UF 16V X7R 0805", Capacitance=1uF, Case Code (Imperial)=0805, Case Code (Metric)=2012, Dielectric=X7R, Manufacturer 1=Yageo, Manufacturer Part Number 1=CC0805KKX7R7BB105, Max Operating Temperature=125°C, Min Operating Temperature=-55°C, Supplier Part Number 1=311-1365-1-ND, Tolerance=10%, Voltage Rating=16V, Case/Package=0805, Mount="Surface Mount", Supplier 1=Digi-Key, Termination=SMD/SMT
C9 C10: "Cap Ceramic 14pF 50V C0G 5% SMD 0603 125C Cardboard T/R", Capacitance=14pF, Case Code (Imperial)=0603, Case Code (Metric)=1608, Dielectric=C0G, Manufacturer 1=Samsung, Max Operating Temperature=125°C, Min Operating Temperature=-55°C, Package Quantity=1, Supplier Part Number 1=1276-2187-1-ND, Tolerance=5%, Voltage Rating=50V, Case/Package=0603, ComponentLink1Description=https://datasheet.ciiva.com/25782/cl10c140jb8nnnc-25782947.pdf?src-supplier=Digi-Key, ComponentLink1URL=https://datasheet.ciiva.com/25782/cl10c140jb8nnnc-25782947.pdf?src-supplier=Digi-Key, Depth=0.8mm, Height=0.8mm, Length=1.6mm, Manufacturer Part Number 1=CL10C140JB8NNNC, Mount="Surface Mount", Packaging="Tape and Reel", Pricing 1="1=0.10000, 10=0.06700, 100=0.02980, 500=0.02130, 1000=0.01673 (USD)", Radiation Hardening=No, RoHS=Yes, Stock 1=187088, Supplier 1=Digi-Key, Thickness=0.035inch, Voltage Rating (DC)=50V, Width=0.031inch
C15: "CAP CER 150PF 250V C0G/NP0 0805", Capacitance=150pF, Case Code (Imperial)=0805, Case Code (Metric)=2012, Dielectric="C0G, NP0", Manufacturer 1="Murata Electronics", Manufacturer Part Number 1=GRM21A5C2E151JW01D, Max Operating Temperature=125°C, Min Operating Temperature=-55°C, Supplier Part Number 1=490-12755-1-ND, Tolerance=5%, Voltage Rating=250V, Case/Package=0805, Mount="Surface Mount", Supplier 1=Digi-Key, Termination=SMD/SMT, Width=0.049inch
C16: "CAP CER 10UF 100V X7S 1210", Manufacturer 1="Murata Electronics", Manufacturer Part Number 1=GRM32EC72A106KE05L, Package="1210 (3225 Metric)", Supplier Part Number 1=490-16266-2-ND, Temperature Coefficient=X7S, Voltage Rating=100V, Mount="Surface Mount", Supplier 1=Digi-Key
C17: "CAP CER 2.2UF 50V X7R 1206", Capacitance=2.2uF, Case Code (Imperial)=1206, Case Code (Metric)=3216, Dielectric=X7R, Manufacturer 1="Murata Electronics", Manufacturer Part Number 1=GCM31CR71H225KA55L, Max Operating Temperature=125°C, Min Operating Temperature=-55°C, Package Quantity=1, Ratings=AEC-Q200, Supplier Part Number 1=490-4796-1-ND, Tolerance=10%, Voltage=50V, Case/Package=1206, Category="Ceramic Capacitors", Depth=1.6mm, Height=1.6mm, Lead Free="Lead Free", Length=3.2mm, Packaging="Tape and Reel", Pricing 2="1=0.54000, 10=0.38400, 100=0.25300, 500=0.18742, 1000=0.15931 (USD)", Radiation Hardening=No, REACH SVHC="No SVHC", RoHS=Yes, Stock 2=102080, Supplier 1=Digi-Key, Termination=SMD/SMT, Thickness=0.071inch, Voltage Rating=50V, Voltage Rating (DC)=50V, Width=1.6mm
C18: "CAP ALUM POLY 220UF 20% 6.3V SMD", Manufacturer 1="Panasonic Electronic Components", Manufacturer Part Number 1=6SVPE220MW, Package="Radial, Can - SMD", Supplier Part Number 1=P16836CT-ND, Voltage Rating=6.3V, Mount="Surface Mount", Supplier 1=Digi-Key
C21 C22 C23 C24 C36: "CAP CER 100PF 50V C0G/NP0 0805", Capacitance=100pF, Case Code (Imperial)=0805, Case Code (Metric)=2012, Dielectric="C0G, NP0", Manufacturer 1=KEMET, Manufacturer Part Number 1=C0805C101J5GACTU, Max Operating Temperature=125°C, Min Operating Temperature=-55°C, Supplier Part Number 1=399-1122-1-ND, Tolerance=5%, Voltage Rating=50V, Case/Package=0805, Mount="Surface Mount", Supplier 1=Digi-Key, Termination=SMD/SMT
C26: "CAP CER 2.2UF 100V X7R 1210", Capacitance=2.2uF, Case Code (Imperial)=1210, Case Code (Metric)=3225, Case/Package="1210 (3225 Metric)", Dielectric=X7R, Manufacturer 1="Taiyo Yuden", Manufacturer Part Number 1=HMK325B7225KMHP, Max Operating Temperature=125°C, Min Operating Temperature=-55°C, Supplier Part Number 1=587-5396-1-ND, Tolerance=10%, Voltage Rating=100V, Mount="Surface Mount", Supplier 1=Digi-Key, Termination=SMD/SMT
C27: "CAP CER 10000PF 100V X7R 0805", Case Code (Imperial)=0805, Case Code (Metric)=2012, Dielectric=X7R, Manufacturer 1=KEMET, Manufacturer Part Number 1=C0805C103K1RACTU, Max Operating Temperature=125°C, Min Operating Temperature=-55°C, Supplier Part Number 1=399-1159-1-ND, Tolerance=10%, Voltage Rating=100V, Case/Package=0805, Mount="Surface Mount", Supplier 1=Digi-Key, Termination=SMD/SMT
C43 C46 C48: "CAP CER 2.2UF 25V X7R 0805", Capacitance=2200nF, Case Code (Imperial)=0805, Case Code (Metric)=2012, Dielectric=X7R, Manufacturer 1="Murata Electronics", Manufacturer Part Number 1=GRM21BR71E225KA73L, Max Operating Temperature=125°C, Min Operating Temperature=-55°C, Ratings=AEC-Q200, Supplier Part Number 1=490-3331-2-ND, Tolerance=10%, Voltage Rating=25V, Case/Package=0805, Depth=1.25mm, Height=1.25mm, Length=2mm, Mount="Surface Mount", Supplier 1=Digi-Key, Termination=SMD/SMT, Thickness=0.049inch, Width=0.049inch
D1: "LED RGB DIFFUSED 4PLCC SMD", Case/Package=PLCC, Color=Blue,Green,Red, Forward Voltage=3.1V, Lens Color=White, Manufacturer 1=Broadcom, Manufacturer Part Number 1=ASMB-MTB1-0A3A2, Supplier Part Number 1=516-3280-1-ND, Test Current=20mA, ComponentLink1Description=http://www.farnell.com/datasheets/2111106.pdf?src-supplier=Farnell, ComponentLink1URL=http://www.farnell.com/datasheets/2111106.pdf?src-supplier=Farnell, ComponentLink2Description=https://docs.broadcom.com/docs/AV02-4194EN?src-supplier=Digi-Key, ComponentLink2URL=https://docs.broadcom.com/docs/AV02-4194EN?src-supplier=Digi-Key, ComponentLink3Description=http://www.farnell.com/datasheets/1801564.pdf?src-supplier=Element14, ComponentLink3URL=http://www.farnell.com/datasheets/1801564.pdf?src-supplier=Element14, ComponentLink4Description=http://www.farnell.com/datasheets/2111106.pdf?src-supplier=Newark, ComponentLink4URL=http://www.farnell.com/datasheets/2111106.pdf?src-supplier=Newark, Dominant Wavelength=470nm, Height=1.9mm, Length=3.2mm, Lens Style=Round, Lens Transparency=Diffused, Luminous Intensity=350mcd, Mount="Surface Mount", Number of Pins=4, Packaging="Cut Tape", Pricing 1="1=0.60000, 10=0.47100, 100=0.30210, 500=0.25980, 1000=0.20059 (USD)", REACH SVHC="No SVHC", RoHS=Yes, Stock 1=142531, Supplier 1=Digi-Key, Viewing Angle=115°, Width=2.8mm
D2 D3 D8: "LED GREEN DIFFUSED 0805 SMD", Forward Voltage Drop=2.2V, Manufacturer 1=OSRAM, Manufacturer Part Number 1="LG R971-KN-1", Package="0805 (2012 Metric)", Supplier Part Number 1=475-1410-1-ND, Mount="Surface Mount", Supplier 1=Digi-Key
D4 D7: library part DIO_SCHOTTKY_40V_500mA, "DIODE SCHOTTKY 40V 500MA SOD123", Capacitance=170pF, Forward Current=0.5A, Manufacturer="Diodes Inc.", Manufacturer 1="Diodes Incorporated", Max Junction Temp=+150°C, Max Repetitive Reverse Voltage=40V, Max Surge Forward Current=5.5A, Package=SOD123, Peak Reverse Current=20uA, Supplier Part Number 1=B0540W-FDITR-ND, Temperature="-65°C to +150°C", Temperature Range Low=-65°C, Automotive=Yes, Automotive Grade="Grade 0", Category=Diode, ComponentLink2Description=Datasheet, ComponentLink2URL=https://www.diodes.com/assets/Datasheets/ds30138.pdf, Device Class L1="Discrete Semiconductors", Device Class L2=Diodes, Device Class L3="Schottky Diodes", Digikey Description="DIODE SCHOTTKY 40V 500MA SOD123", Footprint Url=https://www.diodes.com/assets/Package-Files/SOD123.pdf, Height=1.45mm, Lead Free=Yes, Manufacturer Part Number=B0540W-7-F, Manufacturer Part Number 1=B0540W-7-F, Mouser Description="Schottky Diodes & Rectifiers 40V 410mW", Octopart=https://octopart.com/b0540w-7-f-diodes+inc.-325656, Reverse Voltage=40V, RoHS=TRUE, Standoff Height=0mm, Supplier 1=Digi-Key, Temperature Range High=+150°C
D5: "DIODE ZENER 16V 500MW SOD123", Case/Package=SOD-123, Forward Voltage=900mV, Manufacturer 1="Diodes Incorporated", Manufacturer Part Number 1=MMSZ5246B-7-F, Max Power Dissipation=500mW, Max Reverse Leakage Current=100nA, Supplier Part Number 1=MMSZ5246B-FDITR-ND, Tolerance=5%, Zener Voltage=16V, Impedance=17Ω, Supplier 1=Digi-Key
D6: library part DIO_100V_300mA, "DIODE GEN PURP 100V 300MA SOD123", Manufacturer 1="Diodes Incorporated", Supplier Part Number 1=1N4148W-FDICT-ND, Device Class L2=Diodes, Manufacturer Part Number 1=1N4148W-7-F, Supplier 1=Digi-Key
D9: "TVS DIODE, 400W, 25.6V, UNI, DO-214AC", Breakdown Voltage=28.5V, Case/Package=SMA, Clamping Voltage=41.4V, Leakage Current=1uA, Manufacturer 1="Vishay Semiconductors", Max Operating Temperature=150°C, Max Power Dissipation=400W, Max Surge Current=40A, Min Operating Temperature=-65°C, Operating Supply Voltage=25.6V, Package Quantity=1800, Peak Pulse Current=9.7A, Power Line Protection=No, Supplier Part Number 1=P4SMA30A-E3/61GICT-ND, Test Current=1mA, Category="TVS Diodes", ComponentLink1Description=https://datasheet.ciiva.com:443/pdfs/VipMasterIC/IC/VISH/VISH-S-A0008073361/VISH-S-A0008073361-1.pdf?src-supplier=IHS+Markit, ComponentLink1URL=https://datasheet.ciiva.com:443/pdfs/VipMasterIC/IC/VISH/VISH-S-A0008073361/VISH-S-A0008073361-1.pdf?src-supplier=IHS+Markit, ComponentLink2Description=https://datasheet.ciiva.com/343/p4sma-343073.pdf?src-supplier=Digi-Key, ComponentLink2URL=https://datasheet.ciiva.com/343/p4sma-343073.pdf?src-supplier=Digi-Key, Composition=Zener, Direction=Unidirectional, Element Configuration=Single, Manufacturer Part Number 1=P4SMA30A-E3/61, Max Reverse Leakage Current=1uA, Min Breakdown Voltage=28.5V, Mount="Surface Mount", Number of Channels=1, Number of Elements=1, Number of Pins=2, Number of Unidirectional Channels=1, Packaging="Tape and Reel", Peak Pulse Power=400W, Polarity=Unidirectional, Pricing 1="1=0.35000, 10=0.28400, 25=0.26000, 100=0.16340, 250=0.16152, 500=0.15126 (USD)", Reverse Breakdown Voltage=28.5V, Reverse Standoff Voltage=25.6V, RoHS=Yes, Stock 1=1849, Supplier 1=Digi-Key
J1: "CONN HEADER XH SIDE 7POS 2.5MM", Color=Natural, Contact Resistance=10mR, Current Rating=3A, Flammability Rating="UL94 V-0", Insulation Resistance=1GR, Manufacturer 1="JST Sales America Inc.", Manufacturer Part Number 1=S7B-XH-A(LF)(SN), Max Operating Temperature=85°C, Min Operating Temperature=-25°C, Package Quantity=250, Supplier Part Number 1=455-2240-ND, Voltage Rating=250V, Category="Headers and Wire Housings", ComponentLink1Description=https://datasheet.ciiva.com/726/exh-726397.pdf?src-supplier=Digi-Key, ComponentLink1URL=https://datasheet.ciiva.com/726/exh-726397.pdf?src-supplier=Digi-Key, ComponentLink2Description=https://datasheet.ciiva.com/8052/5448-8052233.pdf?src-supplier=Element14, ComponentLink2URL=https://datasheet.ciiva.com/8052/5448-8052233.pdf?src-supplier=Element14, ComponentLink3Description=https://datasheet.ciiva.com/16484/exh-16484539.pdf?src-supplier=Future+Electronics, ComponentLink3URL=https://datasheet.ciiva.com/16484/exh-16484539.pdf?src-supplier=Future+Electronics, Connector Type="Header,Male Pin", Contact Material=Brass, Contact Plating=Tin,Lead, Contact Shape=Square, Fastening Type=Detent, Gender=Male, Insulation Color=Natural, Insulation Material=Nylon, Lead Free="Lead Free", Lead Pitch=2.5mm, Mount="Through Hole", Number of Contacts=7, Number of Positions=7, Number of Rows=1, Orientation="Right Angle", Packaging=Bulk, Pitch=2.5mm, Pricing 2="10=1.05000, 100=0.92700, 500=0.83300, 1000=0.81300, 5000=0.74700, 10000=0.69900 (CAD)", REACH SVHC="No SVHC", RoHS=Yes, Supplier 1=Digi-Key, Termination=Solder, Voltage Rating (AC)=250V, Wire/Cable Gauge=22AWG
J2: "CONN TERM BLOCK 2POS 15MM 1-8AWG", Color=Black, Current=115A, Manufacturer 1=Molex, Manufacturer Part Number 1=0399200302, Max Operating Temperature=130°C, Max Supply Voltage (AC)=600V, Min Operating Temperature=-40°C, Supplier Part Number 1=WM20114-ND, Category="Terminal Blocks", ComponentLink1Description=https://datasheet.ciiva.com/6751/399200305-sd-6751818.pdf?src-supplier=Digi-Key, ComponentLink1URL=https://datasheet.ciiva.com/6751/399200305-sd-6751818.pdf?src-supplier=Digi-Key, Contact Material=Copper, Contact Plating=Copper,Tin,Bright, Depth=20.32mm, Housing Color=Black, Housing Material=Polybutylene, Length=32mm, Max Voltage Rating (AC)=600V, Mount="Through Hole", Number of Circuits=2, Number of Contacts=2, Number of Levels=1, Number of Positions Per Level=2, Number of Rows=1, Orientation=Straight, Packaging=Bulk, Pitch=0.591inch, Plating=Brass,Bronze,Tin, Pricing 2="1=9.66000, 10=8.27400, 25=7.89600, 50=7.09800, 100=6.72000, 250=6.09000, 500=5.67000, 1000=5.35500, 5000=5.04000 (USD)", Radiation Hardening=No, RoHS=Yes, Stock 2=268, Supplier 1=Digi-Key, Termination=Solder, Voltage=600V, Wire Gauge (Max)=8AWG, Wire Gauge (Min)=1AWG
J3: "HIGH QUALITY GOLD PLATED XT90 MA", Manufacturer 1=DFRobot, Manufacturer Part Number 1=FIT0588, Supplier Part Number 1=1738-1438-ND, Supplier 1=Digi-Key
J4: "CONN HEADER R/A 4POS 2.54MM", Color=White, Contact Resistance=10mR, Current Rating=4A, Flammability Rating="UL94 V-0", Insulation Resistance=50GR, Manufacturer 1=Molex, Manufacturer Part Number 1=22-05-3041, Max Operating Temperature=75°C, Min Operating Temperature=0°C, Package Quantity=12000, Supplier Part Number 1=WM4302-ND, Voltage Rating=250V, Approvals=UL,CSA, Category="Headers and Wire Housings", ComponentLink1Description=https://datasheet.ciiva.com/7106/1710343-7106224.pdf?src-supplier=Newark, ComponentLink1URL=https://datasheet.ciiva.com/7106/1710343-7106224.pdf?src-supplier=Newark, ComponentLink2Description=https://datasheet.ciiva.com/19462/233453-19462483.pdf?src-supplier=Jameco, ComponentLink2URL=https://datasheet.ciiva.com/19462/233453-19462483.pdf?src-supplier=Jameco, ComponentLink3Description=https://datasheet.ciiva.com/10090/0022053041-pcb-headers-10090549.pdf?src-supplier=Avnet, ComponentLink3URL=https://datasheet.ciiva.com/10090/0022053041-pcb-headers-10090549.pdf?src-supplier=Avnet, ComponentLink4Description=https://datasheet.ciiva.com/5153/0022053041-pcb-headers-158631-5153963.pdf?src-supplier=Mouser, ComponentLink4URL=https://datasheet.ciiva.com/5153/0022053041-pcb-headers-158631-5153963.pdf?src-supplier=Mouser, ComponentLink5Description=https://datasheet.ciiva.com/11746/0900766b80d8f337-11746364.pdf?src-supplier=RSComponents, ComponentLink5URL=https://datasheet.ciiva.com/11746/0900766b80d8f337-11746364.pdf?src-supplier=RSComponents, ComponentLink6Description=https://datasheet.ciiva.com/3933/302090022053041-pcb-headers-3933101.pdf?src-supplier=Arrow, ComponentLink6URL=https://datasheet.ciiva.com/3933/302090022053041-pcb-headers-3933101.pdf?src-supplier=Arrow, ComponentLink7Description=https://datasheet.ciiva.com/19462/1965841-19462350.pdf?src-supplier=Jameco, ComponentLink7URL=https://datasheet.ciiva.com/19462/1965841-19462350.pdf?src-supplier=Jameco, ComponentLink8Description=https://datasheet.ciiva.com/7843/1631486-7843895.pdf?src-supplier=Element14, ComponentLink8URL=https://datasheet.ciiva.com/7843/1631486-7843895.pdf?src-supplier=Element14, ComponentLink9Description=https://datasheet.ciiva.com/16656/0022053041-pcb-headers-16656124.pdf?src-supplier=Avnet+Europe, ComponentLink9URL=https://datasheet.ciiva.com/16656/0022053041-pcb-headers-16656124.pdf?src-supplier=Avnet+Europe, Contact Gender=Male, Contact Material=Brass, Contact Plating=Tin,Copper, Depth=12.83mm, Gender=Male, Glow Wire Compliant=Non-compliant, Halogen Free="Low Halogen", Height=6.35mm, Housing Color=White, Housing Material=Nylon, Lead Free="Lead Free", Length=10.16mm, Max Current Rating=4A, Mount="Through Hole", Number of Circuits=4, Number of Contacts=4, Number of Positions=4, Number of Rows=1, Orientation="Right Angle", Packaging=Bulk, Pitch=2.54mm, Pricing 2="1=0.51000, 10=0.47800, 100=0.36620, 500=0.31840, 1000=0.26268, 5000=0.23084, 10000=0.21492 (USD)", Radiation Hardening=No, REACH SVHC=Unknown, RoHS=Yes, Stock 2=1752, Supplier 1=Digi-Key, Termination="Through Hole", Voltage Rating (DC)=250V
J5: "CONN HEADER VERT 8POS 2.54MM", Manufacturer 1="Harwin Inc.", Manufacturer Part Number 1=M20-9980445, Supplier Part Number 1=952-2122-ND, Mount="Through Hole", Supplier 1=Digi-Key
J6: "12 _9 + 3_ Position Card Connector Secure Digital - SD Surface Mount, Right Angle Gold", Manufacturer 1="Hirose Electric Co Ltd", Manufacturer Part Number 1=DM1AA-SF-PEJ(21), Supplier Part Number 1=HR845CT-ND, Card Type=SD, Mount="Surface Mount", Supplier 1=Digi-Key
L1: library part IND_15uH_1.9A, "FIXED IND 15UH 1.9A 95.8MOHM SMD", Case/Package=Nonstandard, Current Rating=1.9A, DC Resistance (DCR)=95.8mR, Inductance=15uH, Inductance Tolerance=20%, Manufacturer 1="Bourns Inc.", Max Operating Temperature=125°C, Min Operating Temperature=-40°C, Package Quantity=1000, Saturation Current=2.3A, Self Resonant Frequency=13MHz, Supplier Part Number 1=SRN6045-150MCT-ND, Test Frequency=100kHz, Category="Fixed Inductors", ComponentLink1Description=https://datasheet.ciiva.com/5986/1705518-5986195.pdf?src-supplier=Farnell, ComponentLink1URL=https://datasheet.ciiva.com/5986/1705518-5986195.pdf?src-supplier=Farnell, ComponentLink2Description=https://datasheet.ciiva.com/11802/0900766b80fe1f3e-11802573.pdf?src-supplier=RSComponents, ComponentLink2URL=https://datasheet.ciiva.com/11802/0900766b80fe1f3e-11802573.pdf?src-supplier=RSComponents, ComponentLink3Description=https://datasheet.ciiva.com/1056/srn6045-1056107.pdf?src-supplier=Digi-Key, ComponentLink3URL=https://datasheet.ciiva.com/1056/srn6045-1056107.pdf?src-supplier=Digi-Key, ComponentLink4Description=https://datasheet.ciiva.com/8512/srn6045-8512989.pdf?src-supplier=Avnet, ComponentLink4URL=https://datasheet.ciiva.com/8512/srn6045-8512989.pdf?src-supplier=Avnet, ComponentLink5Description=https://datasheet.ciiva.com/17113/70231653-17113165.pdf?src-supplier=Allied+Electronics, ComponentLink5URL=https://datasheet.ciiva.com/17113/70231653-17113165.pdf?src-supplier=Allied+Electronics, ComponentLink6Description=https://datasheet.ciiva.com/17284/srn6045-17284750.pdf?src-supplier=Avnet+Europe, ComponentLink6URL=https://datasheet.ciiva.com/17284/srn6045-17284750.pdf?src-supplier=Avnet+Europe, ComponentLink7Description=https://datasheet.ciiva.com/4954/srn6045-70649-4954231.pdf?src-supplier=Mouser, ComponentLink7URL=https://datasheet.ciiva.com/4954/srn6045-70649-4954231.pdf?src-supplier=Mouser, ComponentLink8Description=https://datasheet.ciiva.com/1056/srn6045-1056106.pdf?src-supplier=Digi-Key, ComponentLink8URL=https://datasheet.ciiva.com/1056/srn6045-1056106.pdf?src-supplier=Digi-Key, ComponentLink9Description=https://datasheet.ciiva.com/1056/srn6045-1056108.pdf?src-supplier=Digi-Key, ComponentLink9URL=https://datasheet.ciiva.com/1056/srn6045-1056108.pdf?src-supplier=Digi-Key, Composition=Wirewound, Core Material=Ferrite, DC Current=1.9A, Depth=6.2mm, Height=4.5mm, Height - Seated (Max)=0.177inch, Length=6mm, Manufacturer Part Number 1=SRN6045-150M, Max DC Current=1.9A, Military Standard=Not, Mount="Surface Mount", Number of Pins=2, Packaging="Tape and Reel", Pricing 1="1=0.60000, 10=0.52300, 100=0.37380, 500=0.31396 (USD)", REACH SVHC="No SVHC", RMS Current (Irms)=1.9A, RoHS=Yes, Shielding=Shielded, Stock 1=16841, Supplier 1=Digi-Key, Termination=SMD/SMT, Tolerance=20%, Weight=0.027725oz, Width=6mm
LCD1: "LCD COG GRAPHIC 128X32", Manufacturer 1="Newhaven Display Intl", Supplier Part Number 1=NHD-C12832A1Z-FSW-FBW-3V3-ND, Manufacturer Part Number 1=NHD-C12832A1Z-FSW-FBW-3V3, Supplier 1=Digi-Key
MH1 MH2 MH3 MH4: "6cm x 6cm"
Q1 Q2: "MOSFET P-CH 40V 40A TO252", Manufacturer 1="Alpha & Omega Semiconductor Inc.", Manufacturer Part Number 1=AOD4189, Power Dissipation (Max)=62.5W, Supplier Device Package="D-PAK (TO-252)", Supplier Part Number 1=785-1351-1-ND, FET Type=P-Channel, Id=40A, Supplier 1=Digi-Key, Vdss=40V, Vgs (Max)=20V
Q3 Q4 Q5 Q6: "MOSFET N-CH 100V 210A POWER56", Manufacturer 1="ON Semiconductor", Manufacturer Part Number 1=FDBL0240N100, Power Dissipation (Max)=300W, Supplier Device Package=8-HPSOF, Supplier Part Number 1=FDBL0240N100CT-ND, FET Type=N-Channel, Id=210A, Supplier 1=Digi-Key, Vdss=100V, Vgs (Max)=20V
Q7: "NMOS N-CH 60V 310mA SOT-323", Manufacturer 1=Nexperia, Manufacturer Part Number 1=2N7002BKW,115, Supplier Part Number 1=1727-4788-1-ND, ComponentLink1Description=https://www.mouser.com/ds/2/302/2N7002BKW-1150600.pdf?src-supplier=Mouser, ComponentLink1URL=https://www.mouser.com/ds/2/302/2N7002BKW-1150600.pdf?src-supplier=Mouser, ComponentLink2Description=http://www.farnell.com/datasheets/1322445.pdf?src-supplier=Farnell, ComponentLink2URL=http://www.farnell.com/datasheets/1322445.pdf?src-supplier=Farnell, ComponentLink3Description=https://assets.nexperia.com/documents/data-sheet/2N7002BKW.pdf?src-supplier=Digi-Key, ComponentLink3URL=https://assets.nexperia.com/documents/data-sheet/2N7002BKW.pdf?src-supplier=Digi-Key, ComponentLink4Description=http://www.farnell.com/datasheets/1322445.pdf?src-supplier=Newark, ComponentLink4URL=http://www.farnell.com/datasheets/1322445.pdf?src-supplier=Newark, Id=310mA, Pricing 1="1=0.36000, 10=0.29600, 25=0.24760, 100=0.12100, 250=0.11908, 500=0.10092, 1000=0.07013 (USD)", RoHS=No, Stock 1=127361, Supplier 1=Digi-Key
Q8: "NMOS N-CH 50V 200mA 1.2V DRIVE SOT-23-3", Manufacturer 1="Rohm Semiconductor", Manufacturer Part Number 1=RUC002N05HZGT116, Supplier Part Number 1=RUC002N05HZGT116CT-ND, Id=200mA, Supplier 1=Digi-Key
R1 R4: "RES SMD 20 OHM 1% 1/8W 0805", Case Code (Imperial)=0805, Case Code (Metric)=2012, Manufacturer 1=Yageo, Manufacturer Part Number 1=RC0805FR-0720RL, Max Operating Temperature=155°C, Min Operating Temperature=-55°C, Power Rating=125mW, Resistance=20, Supplier Part Number 1=311-20.0CRCT-ND, Tolerance=1%, Supplier 1=Digi-Key, Termination=SMD/SMT
R2 R3 R13 R24 R25 R30 R31 R32 R33 R35 R36 R39 R42 R43 R47 R49: "RES SMD 100 OHM 1% 1/8W 0805", Case Code (Imperial)=0805, Case Code (Metric)=2012, Manufacturer 1=Yageo, Manufacturer Part Number 1=RC0805FR-07100RL, Power Rating=125mW, Supplier Part Number 1=311-100CRCT-ND, Mount="Surface Mount", Supplier 1=Digi-Key
R5 R8 R10 R11 R14 R26 R28 R45 R46 R48 R50 R51 R52 R53: "RES SMD 1K OHM 1% 1/8W 0805", Case Code (Imperial)=0805, Case Code (Metric)=2012, Manufacturer 1=Yageo, Manufacturer Part Number 1=RC0805FR-071KL, Max Operating Temperature=155°C, Min Operating Temperature=-55°C, Power Rating=125mW, Resistance=1K, Supplier Part Number 1=311-1.00KCRCT-ND, Tolerance=1%, Supplier 1=Digi-Key, Termination=SMD/SMT
R6 R7 R9 R23 R27 R34 R37 R38: "RES SMD 10K OHM 1% 1/8W 0805", Case Code (Imperial)=0805, Case Code (Metric)=2012, Manufacturer 1=Yageo, Manufacturer Part Number 1=RC0805FR-0710KL, Max Operating Temperature=155°C, Min Operating Temperature=-55°C, Power Rating=125mW, Resistance=10K, Supplier Part Number 1=311-10.0KCRCT-ND, Tolerance=1%, Supplier 1=Digi-Key, Termination=SMD/SMT
R12: "RES SMD 51K OHM 1% 1/8W 0805", Case Code (Imperial)=0805, Case Code (Metric)=2012, Manufacturer 1="Vishay Dale", Manufacturer Part Number 1=CRCW080551K0FKEA, Max Operating Temperature=155°C, Min Operating Temperature=-55°C, Power Rating=125mW, Resistance=51K, Supplier Part Number 1=541-51.0KCCT-ND, Tolerance=1%, Supplier 1=Digi-Key, Termination=SMD/SMT
R15: "RES SMD 22.1K OHM 1% 1/8W 0805", Case Code (Imperial)=0805, Case Code (Metric)=2012, Manufacturer 1="Vishay Dale", Manufacturer Part Number 1=CRCW080522K1FKEA, Max Operating Temperature=155°C, Min Operating Temperature=-55°C, Power Rating=125mW, Resistance=22.1kΩ, Supplier Part Number 1=541-22.1KCCT-ND, Tolerance=1%, Supplier 1=Digi-Key, Termination=SMD/SMT
R16 R17: "RES 200 OHM 5% 1W 2512", Manufacturer 1="Stackpole Electronics Inc", Manufacturer Part Number 1=RMCF2512JT200R, Package=2512, Supplier Part Number 1=RMCF2512JT200RCT-ND, Tolerance=5%, Dimensions="0.250\" L x 0.125\" W (6.35mm x 3.18mm)", Mount="Surface Mount", Supplier 1=Digi-Key
R18 R19 R20 R21 R40 R41: "RES SMD 10M OHM 5% 1/8W 0805", Case Code (Imperial)=0805, Case Code (Metric)=2012, Manufacturer 1=Yageo, Manufacturer Part Number 1=RC0805JR-0710ML, Package="0805 (2012 Metric)", Supplier Part Number 1=311-10MARCT-ND, Tolerance=5%, Mount="Surface Mount", Supplier 1=Digi-Key
R22: "RES SMD 510 OHM 1% 1/8W 0805", Case Code (Imperial)=0805, Case Code (Metric)=2012, Manufacturer 1=Yageo, Manufacturer Part Number 1=RC0805FR-07510RL, Max Operating Temperature=155°C, Min Operating Temperature=-55°C, Power Rating=125mW, Resistance=510R, Supplier Part Number 1=311-510CRCT-ND, Tolerance=1%, Supplier 1=Digi-Key, Termination=SMD/SMT
R29: "RES SMD 1.1K OHM 1% 1/8W 0805", Case Code (Imperial)=0805, Case Code (Metric)=2012, Manufacturer 1=Yageo, Manufacturer Part Number 1=RC0805FR-071K1L, Max Operating Temperature=155°C, Min Operating Temperature=-55°C, Power Rating=125mW, Resistance=1K1, Supplier Part Number 1=311-1.10KCRCT-ND, Tolerance=1%, Mount="Surface Mount", Supplier 1=Digi-Key, Termination=SMD/SMT
R44: "RES 0.001 OHM 1% 10W 5931", Manufacturer 1="Vishay Dale", Manufacturer Part Number 1=WSLP59311L000FEA, Package=5931, Supplier Part Number 1=541-10012-1-ND, Tolerance=1%, Dimensions="0.591\" L x 0.305\" W (15.00mm x 7.75mm)", Mount="Surface Mount", Supplier 1=Digi-Key
RT1: "THERMISTOR NTC 10KOHM 3380K BEAD", Case/Package=Radial, Current Rating=120uA, Manufacturer 1=Murata, Manufacturer Part Number 1=NXFT15XH103FA2B100, Max Operating Temperature=125°C, Max Power Dissipation=100mW, Min Operating Temperature=-40°C, Package Quantity=1000, Power Rating=7.5mW, Resistance=10k, Supplier Part Number 1=490-5630-ND, Tolerance=1%, Category="Interface ICs", ComponentLink1Description=https://datasheet.ciiva.com/2849/r44e-2849356.pdf?src-supplier=Digi-Key, ComponentLink1URL=https://datasheet.ciiva.com/2849/r44e-2849356.pdf?src-supplier=Digi-Key, ComponentLink2Description=https://datasheet.ciiva.com/3282/r44e-3282445.pdf?src-supplier=Avnet, ComponentLink2URL=https://datasheet.ciiva.com/3282/r44e-3282445.pdf?src-supplier=Avnet, Lead Diameter=0.3mm, Mount="Free Hanging,Through Hole", Number of Pins=2, Packaging=Bulk, Pricing 1="1=0.91000, 5=0.86400, 10=0.75200, 25=0.66080, 50=0.54900, 100=0.46760, 500=0.40660, 1000=0.35578, 5000=0.31512 (USD)", RoHS=Yes, Stock 1=19053, Supplier 1=Digi-Key, Termination=Wire